# Altium PCB AphelionGroundStation.PcbDoc (part 1 of 3)
Units mm, origin at the board's own origin, x right, y up, seen from the top; angles counter-clockwise.
Board outline 70.66 x 90.48 mm, 2 copper layers (Top Layer, Bottom Layer); 32 components, 39 nets, 122 pads, 24 vias.
Unrouted connection lines stored in the file: 1.
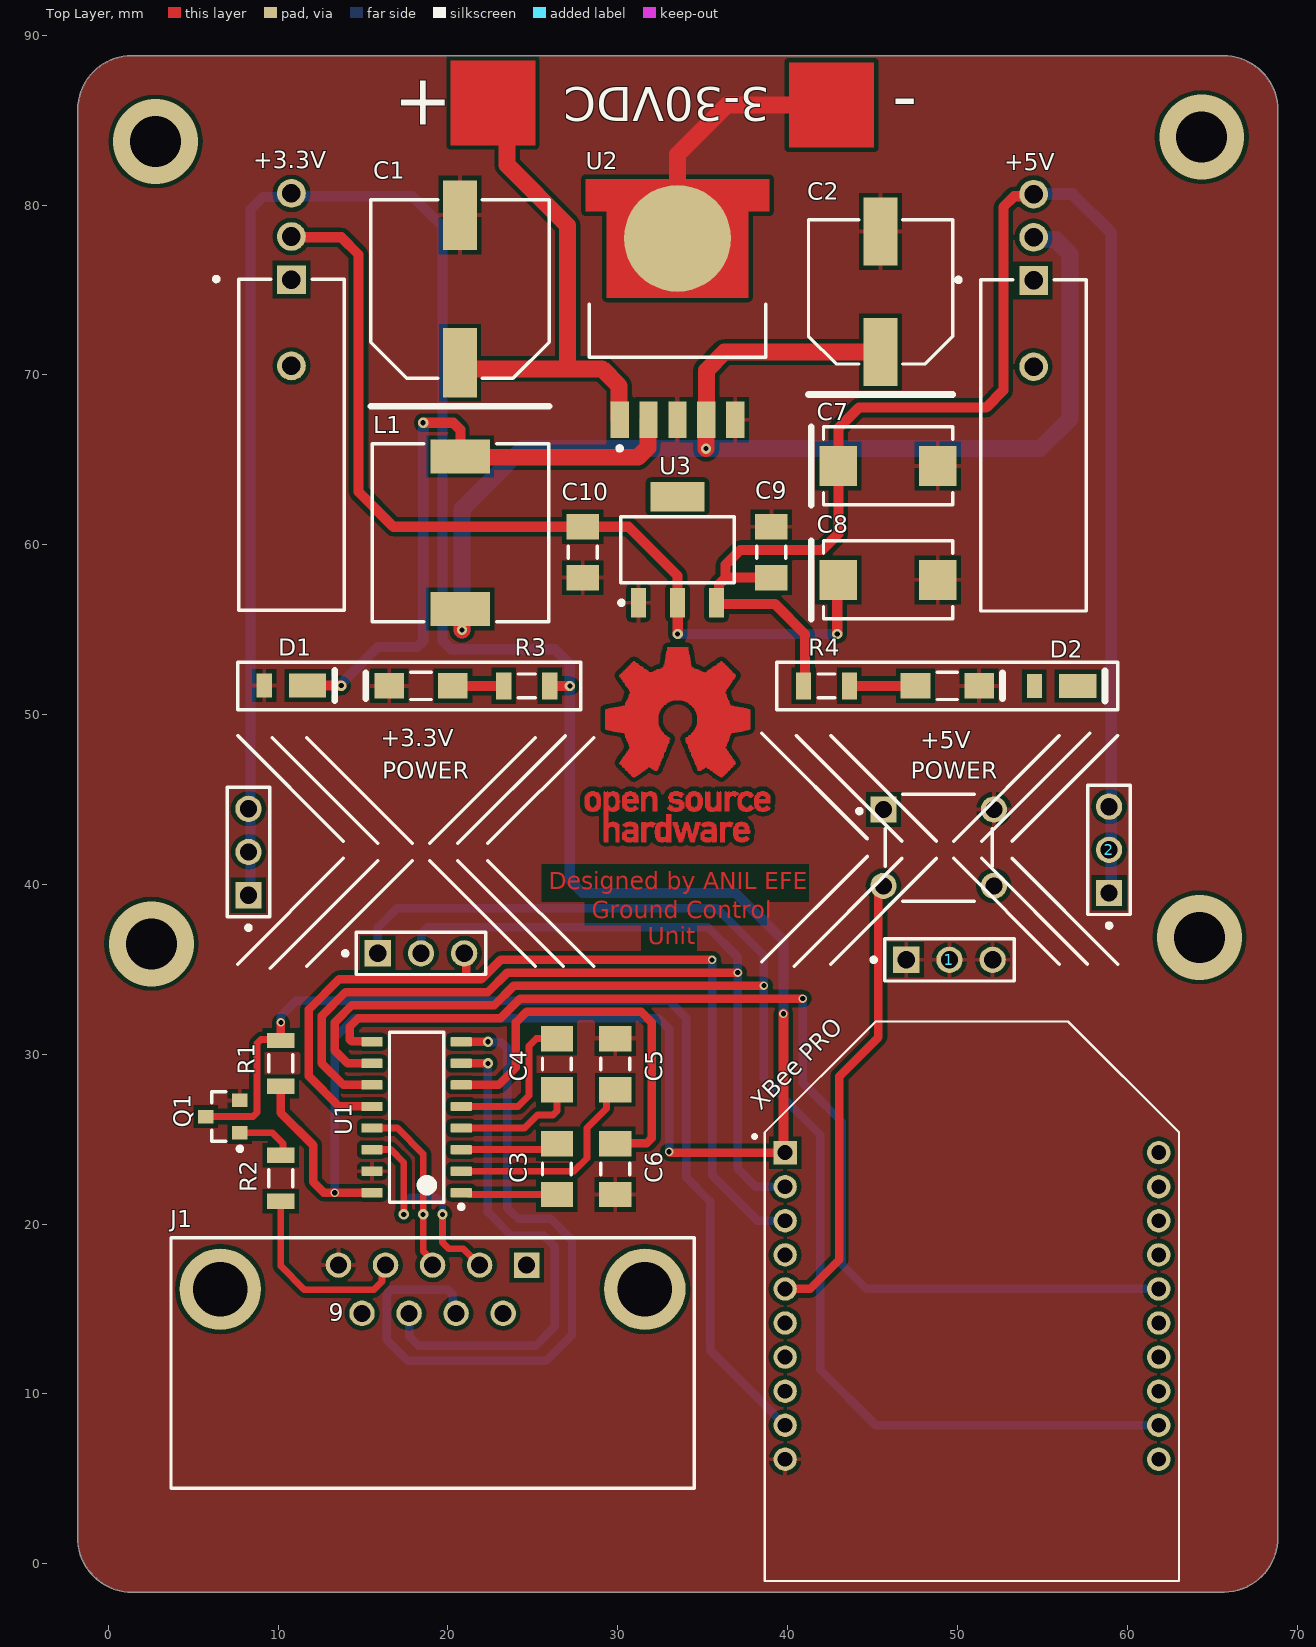
[diagram p0: Top Layer view]
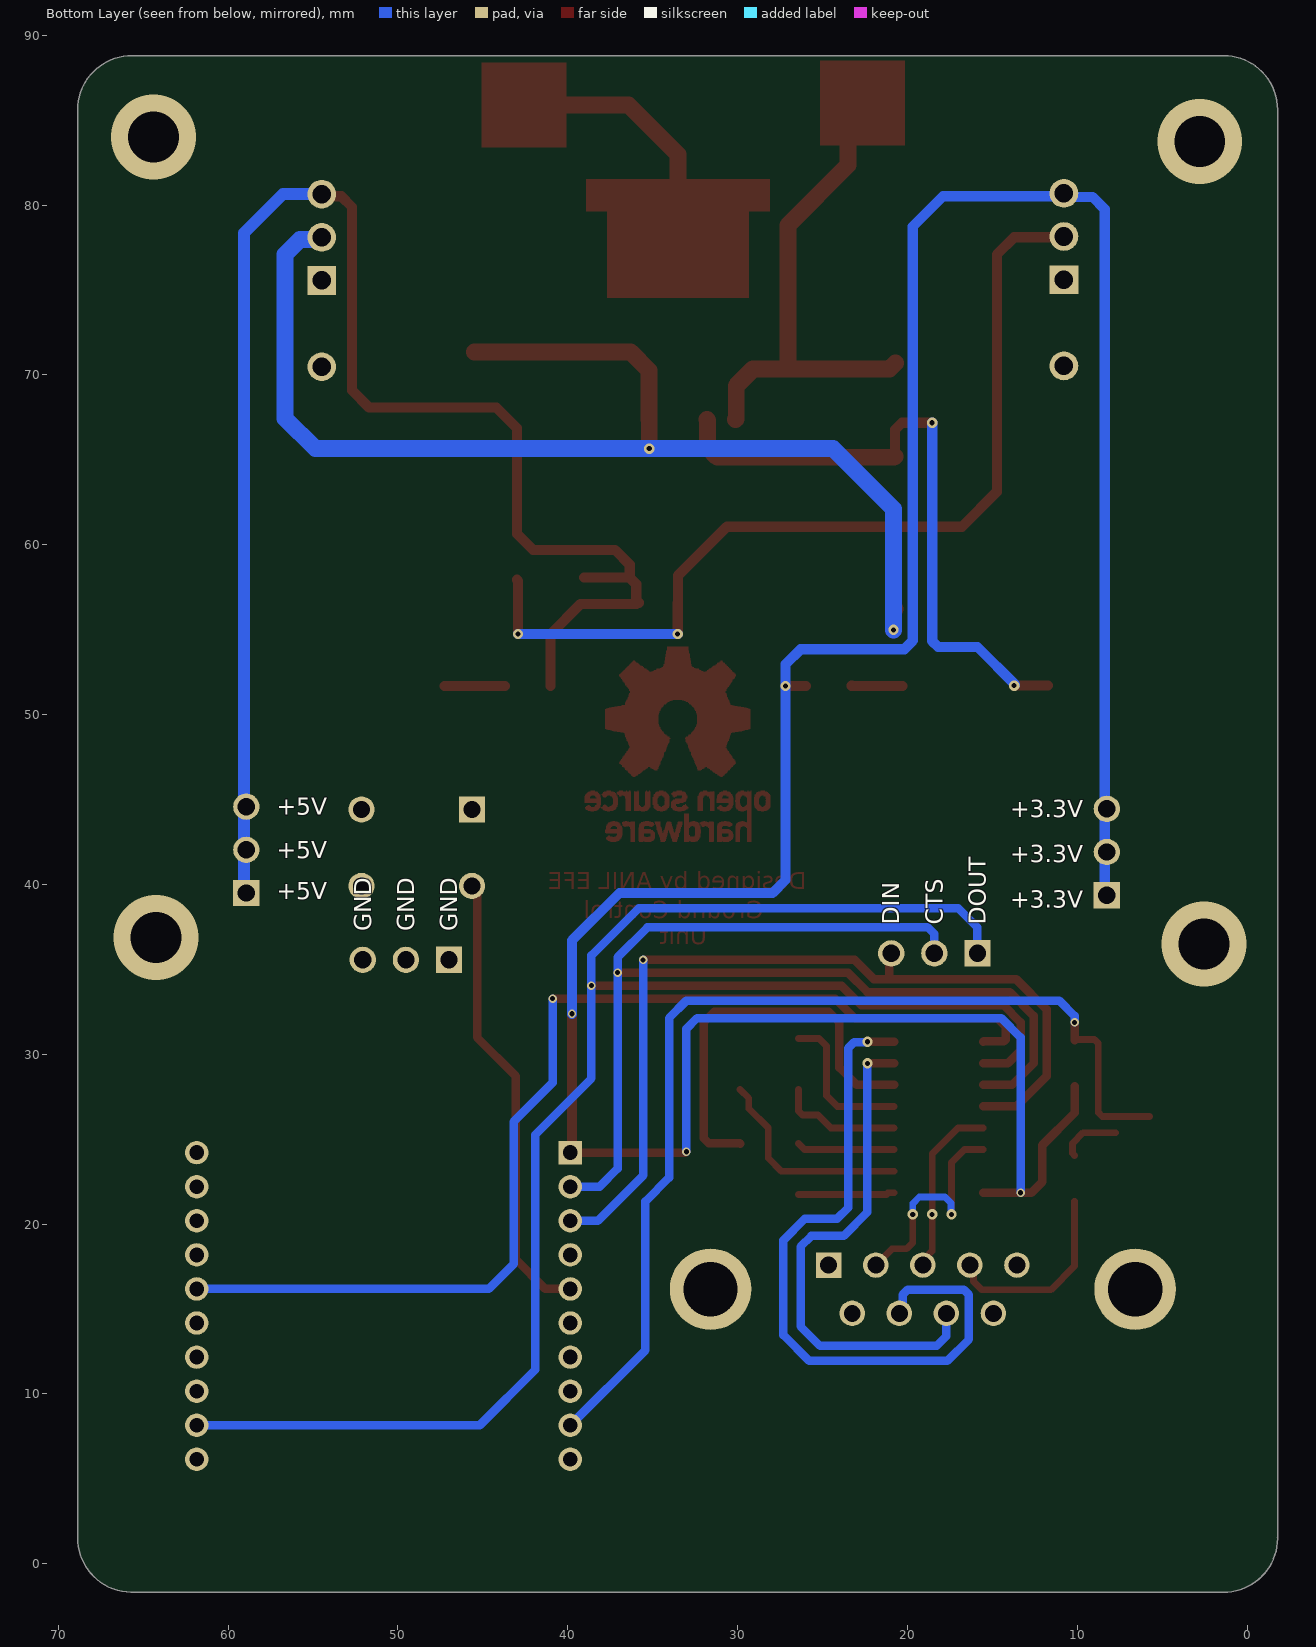
[diagram p1: Bottom Layer view, seen from below]
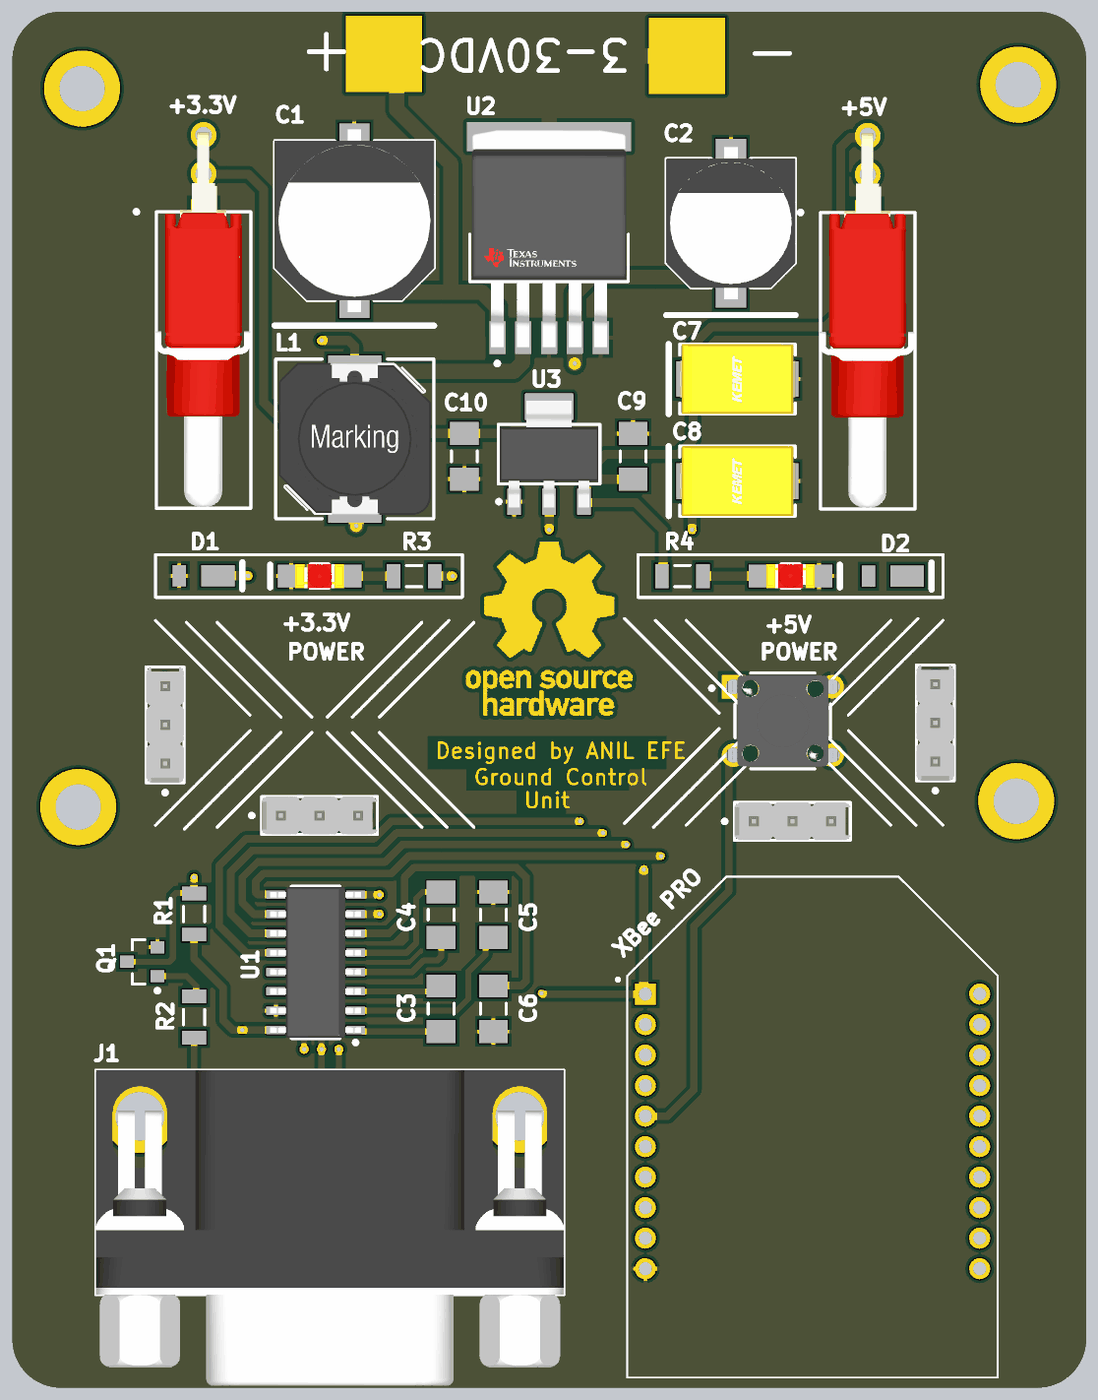
[diagram p4: 3D render of the assembled board from above, using the file's embedded part models]

## Layer stack, top to bottom
Top Solder: solder mask 0.0102, Solder Resist, Dk 3.5
Top Layer: signal copper 0.0356
Dielectric 1: dielectric 0.32, FR-4, Dk 4.8
Bottom Layer: signal copper 0.0356
Bottom Solder: solder mask 0.0102, Solder Resist, Dk 3.5

## Board outline
-1.792,1.489 cw(c-1.642,1.489) -1.789,1.519 cw(c-1.651,1.578) -1.801,1.578 -1.801,85.598 cw(c1.415,85.598) -0.859,87.872 cw(c1.371,85.642) 1.371,88.796 65.659,88.796 cw(c65.659,85.58) 67.933,87.854 cw(c65.703,85.624) 68.857,85.624 cw(c68.707,85.624) 68.857,85.621 68.857,1.524 cw(c65.641,1.524) 67.915,-0.75 cw(c65.685,1.48) 65.711,-1.674 cw(c65.659,-1.533) 65.659,-1.683 1.406,-1.683 cw(c1.406,1.533) -0.868,-0.741 cw(c1.362,1.489)

## Design rules (kind name [scope] priority, off if disabled: settings)
Clearance [All] p1: gap=0.254 ignorepadtopadclearanceinfootprint=FALSE except(0: Arc-Hole Track-Hole SMDPad-Hole THPad-Hole Via-Hole Fill-Hole Poly-Hole Region-Hole Text-Hole)
ComponentClearance [All] p1: gap=0 collisioncheckmode=3 verticalgap=0 showdistances=FALSE
Height [All] p1: minheight=0 maxheight=50 prefheight=12.7
PolygonConnect [All] p1: connectstyle=Relief reliefconductorwidth=0.254 reliefentries=4 polygonreliefangle="90 Angle" airgapwidth=0.254
RoutingVias [All] p1: holewidth=0.711 width=1.27 viastyle="Through Hole" minholewidth=0.711 minwidth=1.27 maxholewidth=0.711 maxwidth=1.27
SolderMaskExpansion [All] p1: expansion=0.102 istentingtop=FALSE
Width [All] p1: maxlimit=5 minlimit=0.254 preferedwidth=0.254 minimp=50.000000 maximp=50.000000 favimp=50.000000
28 further rules are at their usual default settings.

## Classes and differential pairs
component class AphelionGroundStation: +3.3V +5V C1 C2 C3 C4 C5 C6 C7 C8 C9 C10 D1 J1 Q1 R1 R2 R4 U1 U2 U3

## Components (designator, comment, footprint, x,y, rotation, side; value= is the part's Value field where it differs from the comment)
1 "Comment" MOLX-22-28-4033_V 49.53,35.56 r0 top
2 "Comment" MOLX-22-28-4033_V 58.928,42.037 r90 top
+3.3V "ET01MD1AVBE" FP-ET01MD1AVBE-MFG 10.785,65.894 r0 top (schematic designator SW2)
+3.3V "POWER LED 3.3V" KING-APTD3216CGCK_V 18.415,51.689 r180 top (schematic designator DS1)
+5V "ET01MD1AVBE" FP-ET01MD1AVBE-MFG 54.486,65.846 r0 top (schematic designator SW1)
+5V "POWER LED 3.3V" KING-APTD3216CGCK_V 49.403,51.689 r0 top (schematic designator DS2)
C1 "680uF" PNSC-FT-V-G_V 20.707,75.059 r90 top
C2 "220uF" PNSC-FP-V-F_V 45.478,74.894 r90 top
C3 "100N" KEMT-1206-2_M 26.416,23.241 r270 top
C4 "100N" KEMT-1206-2_M 26.416,29.419 r270 top
C5 "100N" KEMT-1206-2_M 29.851,29.419 r90 top
C6 "100N" KEMT-1206-2_M 29.851,23.241 r270 top
C7 "22uF" KEMT-T491-D_L 45.914,64.644 r0 top
C8 "22uF" KEMT-T491-D_L 45.914,57.933 r0 top
C9 "100N" KEMT-1206-2_M 39.044,59.563 r270 top
C10 "100N" KEMT-1206-2_M 27.94,59.563 r90 top
D1 "DFLS1200-7" DIOD-POWERDI123-2_A_V 10.785,51.708 r0 top
D2 "DFLS1200-7" DIOD-POWERDI123-2_A_V 56.134,51.689 r0 top (schematic designator D1)
J1 "DB9" 618009231321 19.094,11.805 r0 top
L1 "33uH" "WE-PD 1050" 20.732,60.706 r270 top
Q1 "BC846B" ONSC-SOT-23-3-318-08_V 6.747,26.33 r180 top
R1 "10K" RESC3216X60X45LL10T20 10.16,29.464 r270 top
R2 "1K" RESC3216X60X45LL10T20 10.16,22.694 r270 top
R3 "1K" RESC3216X60X45LL10T20 24.638,51.689 r180 top
R4 "1K" RESC3216X60X45LL10T20 42.291,51.689 r0 top
U1 "MAX232DR" D0016A_L 18.161,26.289 r180 top
U2 "LM2596SX-12/NOPB" FP-KTT0005B-MFG 33.515,75.494 r0 top
U3 "LM1117IMP-3.3" DCY0004A_N 33.515,59.708 r90 top
"XBee PRO" "XBP24CAUIT-001" MODULE_XBP24CAUIT-001 50.851,15.456 r0 top (schematic designator U)
? "Comment" FP-1825910-2-0 48.895,42.164 r0 top
? "Comment" MOLX-22-28-4033_V 8.255,41.91 r90 top
? "Comment" MOLX-22-28-4033_V 18.415,35.941 r0 top

## Footprints (in the part's own frame and the unit in brackets; to place one, negate y for a bottom-side part, rotate by r counter-clockwise, add the part's x,y. Pads: shape width x height; smd on the part's side, far side on the other; paste and mask are expansions set on the pad)
618009231321 [mm] "9 pins, right angled, 10.3mm, with hex screw"
  rect 1.5x1.5 hole 1: 1(5.54,5.78)
  round 1.5 hole 1: 2(2.77,5.78) 3(0,5.78) 4(-2.77,5.78) 5(-5.54,5.78) 6(4.155,2.94) 7(1.385,2.94) 8(-1.385,2.94) 9(-4.155,2.94)
  round 4.8 hole 3.2: M1(-12.5,4.36) M2(12.5,4.36)
  silkscreen extent -15.4,-7.36 15.4,7.39, body extent -15.4,-13.36 15.4,7.39, height 12.55
D0016A_L [mm] "SOIC, 16-Leads, Body 10x4mm, Pitch 1.27mm, IPC High Density"
  rrect18% 1.25x0.55 smd: 1(-2.625,4.445) 2(-2.625,3.175) 3(-2.625,1.905) 4(-2.625,0.635) 5(-2.625,-0.635) 6(-2.625,-1.905) 7(-2.625,-3.175) 8(-2.625,-4.445) 9(2.625,-4.445) 10(2.625,-3.175) 11(2.625,-1.905) 12(2.625,-0.635) 13(2.625,0.635) 14(2.625,1.905) 15(2.625,3.175) 16(2.625,4.445)
  silkscreen extent -2.75,-5 1.6,5.39, body extent -3,-4.95 3,4.95, height 1.59
DCY0004A_N [mm] "SOT223, 4-Leads, Body 6.7x3.7mm, Pitch 2.3mm, IPC Medium Density"
  rrect11% 1.75x0.9 smd: 1(-3.125,2.3) 2(-3.125,0) 3(-3.125,-2.3)
  rrect6% 1.75x3.2 smd: 4(3.125,0)
  silkscreen extent -3.25,-3.35 1.95,3.42, body extent -3.5,-3.25 3.5,3.25, height 1.62
DIOD-POWERDI123-2_A_V [mm] "SOD, 2-Leads, Body 2.8x1.78mm"
  rect 0.9x1.4 smd: 1(-1.6,0)
  rect 2.2x1.4 smd: 2(0.95,0)
  silkscreen extent 2.55,-0.89 2.55,0.89, body extent -1.4,-0.89 1.4,0.89, height 1.01
FP-1825910-2-0 [mm]
  rect 1.54x1.54 hole 0.99 paste-1000 mask+0: 1(-3.25,2.25)
  round 1.54 hole 0.99 paste-1000 mask+0: 2(3.25,2.25) 3(-3.25,-2.25) 4(3.25,-2.25)
  silkscreen extent -4.79,-3.15 3.15,3.15, body extent -4.12,-3.24 4.12,3.24, height 0.25
FP-ET01MD1AVBE-MFG [mm]
  rect 1.69x1.69 hole 1.09 paste-1000 mask+0: 1(0,9.715)
  round 1.69 hole 1.09 paste-1000 mask+0: 2(0,12.255) 3(0,14.795) 4(0,4.635)
  silkscreen extent -4.55,-9.74 3.11,9.87, body extent -3.21,-9.84 3.21,15.74, height 0.25
FP-KTT0005B-MFG [mm]
  rect 1.07x2.16 smd paste+0 mask+0: 1(-3.4,-8.13) 2(-1.7,-8.13) 3(0,-8.13) 4(1.7,-8.13) 5(3.4,-8.13)
  round 6.291 smd paste+0 mask+0: 6(0,2.545)
  Top Layer region: -5.4,6.04 5.4,6.04 5.4,4.13 4.165,4.13 4.165,-0.95 -4.165,-0.95 -4.165,4.13 -5.4,4.13 -5.4,6.04
  silkscreen extent -5.21,-9.95 5.21,-1.33, body extent -5.5,-9.31 5.5,6.14, height 0.25
KEMT-1206-2_M [mm] "SMD, 2-Leads, Body 3.4x1.8mm, IPC Low Density"
  rect 1.5x1.9 smd: 1(-1.5,0) 2(1.5,0)
  silkscreen extent -0.35,-0.85 0.35,0.85, body extent -1.7,-0.9 1.7,0.9, height 0.88
KEMT-T491-D_L [mm] "Molded Capacitor, 2-Leads, Body 7.60x4.60mm, IPC High Density"
  rect 2.2x2.35 smd: 1(-2.925,0) 2(2.925,0)
  silkscreen extent -4.52,-2.3 3.8,2.3, body extent -3.8,-2.3 3.8,2.3, height 3.1
KING-APTD3216CGCK_V [mm] "SMD, 2-Leads, Body 3.2x1.6mm"
  rect 1.75x1.5 smd: 1(-1.875,0) 2(1.875,0)
  silkscreen extent -0.6,-0.8 3.25,0.8, body extent -1.6,-0.8 1.6,0.8, height 1.8
MODULE_XBP24CAUIT-001 [mil]
  rect 54.25x54.25 hole 34.25: 1(-433,344.5)
  round 54.25 hole 34.25: 2(-433,265.5) 3(-433,186.5) 4(-433,107.5) 5(-433,28.5) 6(-433,-50.5) 7(-433,-129.5) 8(-433,-208.5) 9(-433,-287.5) 10(-433,-366.5) 11(433,-366.5) 12(433,-287.5) 13(433,-208.5) 14(433,-129.5) 15(433,-50.5) 16(433,28.5) 17(433,107.5) 18(433,186.5) 19(433,265.5) 20(433,344.5)
  silkscreen extent -508,-648 480,648
MOLX-22-28-4033_V [mm] "THD, 3-Leads, Body 7.62x2.49mm, Pitch 2.54mm"
  rect 1.55x1.55 hole 1.02: 1(-2.54,0)
  round 1.55 hole 1.02: 2(0,0) 3(2.54,0)
  silkscreen extent -4.58,-1.24 3.81,1.24, body extent -3.81,-1.24 3.81,1.24, height 8.38
ONSC-SOT-23-3-318-08_V [mm] "SOT23, 3-Leads, Body 2.92x1.3mm, Pitch 0.95mm"
  rect 0.9x0.8 smd: 1(-1,0.95) 2(-1,-0.95) 3(1,0)
  silkscreen extent -1.13,-1.46 0.65,2.02, body extent -0.65,-1.46 0.65,1.46, height 1.11
PNSC-FP-V-F_V [mm] "CAPAE, 2-Leads, Body 8.50x8.50mm"
  rect 4x2 smd: 1(-3.55,0) 2(3.55,0)
  silkscreen extent -6.05,-4.25 4.25,4.25, body extent -5,-4.25 5,4.25, height 10.5
PNSC-FT-V-G_V [mm] "CAPAE, 2-Leads, Body 10.50x10.50mm"
  rect 4.1x2 smd: 1(-4.35,0) 2(4.35,0)
  silkscreen extent -6.9,-5.25 5.25,5.25, body extent -6,-5.25 6,5.25, height 10.5
RESC3216X60X45LL10T20 [mm] "Chip Resistor, 2-Leads, Body 3.20x1.60mm, IPC High Density"
  rect 0.9x1.6 smd: 1(-1.35,0) 2(1.35,0)
  silkscreen extent -0.5,-0.7 0.5,0.7, body extent -1.65,-0.85 1.65,0.85, height 0.6
"WE-PD 1050" [mm] "SMD Inductor, 2-Leads, Body 10,0x10,0mm"
  rect 2x3.5 smd: 1(-4.5,0) 2(4.5,0)
  silkscreen extent -5.25,-5.2 5.25,5.2, body extent -5,-5 5,5, height 4.75

## Part data
+3.3V +5V: library part CMP-10041-000001-1, "SWITCH TOGGLE SPDT 0.4VA 20V", Contact Resistance=20mΩ, Manufacturer="C&K Components", Temperature="-30°C to +85°C", Temperature Range High=+85°C, Temperature Range Low=-30°C, Voltage Rating Ac=20V, Automotive=No, Category=Switch, ComponentLink2Description=Datasheet, ComponentLink2URL=https://www.ckswitches.com/media/1387/ettoggle.pdf, Device Class L1=Electromechanical, Device Class L2=Switches, Device Class L3="Toggle Switches", Digikey Description="SWITCH TOGGLE SPDT 0.4VA 20V", Electromechanical Life=60000Cycles, Height=8.77mm, Lead Free=Yes, Manufacturer Part Number=ET01MD1AVBE, Mount="Through Hole", Mouser Description="Toggle Switches ON-ON SPDT R/A PCB", Octopart=https://octopart.com/et01md1avbe-c%26k+components-2490750, Package=ET01MD1AVBE, RoHS=TRUE, Standoff Height=0.64mm, Throw Configuration=SPDT, Voltage Rating Dc=20V
+3.3V +5V: library part CMP-2000-05792-1, "Chip LED Lamp, Green, 5 V, 30 mA, -40 to 85 degC, 2-Pin SMD, RoHS, Tape and Reel", Color=Green, Current - Test=20mA, Manufacturer=Kingbright, Millicandela Rating=300mcd, Package / Case=1206(3216Metric), Package Description="2-Pin Surface Mount Device, Body 3.2 x 1.6 mm", Package Reference=APTD3216CGCK, Standard Package=2,000, Voltage - Forward (Vf) (Typ)=2.1V, 3D Model="APTD3216x.sldprt /  / APTD3216x.pro /  / APTD3216x.igs /  / APTD3216x.stp", Catalog Drawings="APTD3216SeriesTop /  / APTD3216SeriesSide", Category=Optoelectronics, Datasheet URL=https://www.kingbrightusa.com/images/catalog/spec/APTD3216CGCK.pdf, Datasheet Version="Rev. V.17B, 04/2015", Family=LEDIndication-Discrete, Height=1.80mm, Lens Style/Size=RoundwithDomedTop,1.6mm, Lens Type=Clear, Manufacturer URL=http://www.kingbright.com/, Mounting Technology=SurfaceMount, Mounting Type=SurfaceMount, Online Catalog=3.2mmx1.6mmRoundwithDomedTop1206PackageLEDs, Other Names=754-1152-2, Packaging=Tape&Reel(TR), Size / Dimension=3.20mmLx1.60mmW, Viewing Angle=50°, Wavelength - Dominant=570nm, Wavelength - Peak=574nm
C1: library part CMP-2000-06218-1, "Aluminum Electrolytic Capacitor, 560 uF, +/- 20%, 35 V, 2-Pin SMD (Size Code G), -55 to 105 degC, RoHS, Tape and Reel", Capacitance=560µF, Case Size/Dimension=Ø10x10.2mm, ESR (Equivalent Series Resistance)=0.06O, Lifetime@Temperature=2000Hrs@105°C, Manufacturer=Panasonic, Operating Temp Range=-55to+105°C, Operating Temp-Max=105°C, Package Description="2-Pin Electrolytic Aluminum Capacitor, Body 10.3 x 10.3 mm", Package Reference=FT-V-G, Rated Voltage=35V, Ripple Current=1190mA, Datasheet URL=http://industrial.panasonic.com/cdbs/www-data/pdf/RDE0000/ABA0000C35.pdf, Datasheet Version=03/2014, Manufacturer URL=http://www.panasonic.com/, Mounting Technology=SurfaceMount, Package URL=http://industrial.panasonic.com/cdbs/www-data/pdf/RDE0000/DME0000COL48.pdf, Series=FT, Type=Can
C2: library part CMP-2000-06215-1, "Aluminum Electrolytic Capacitor, 220 uF, +/- 20%, 35 V, 2-Pin SMD (Size Code F), -55 to 105 degC, RoHS, Tape and Reel", AE Capacitor Case=RadialCan-SMD, Capacitance=220µF, Capacitance Tolerance=±20%, Leakage Current=7.7µA, Life Time @ Temperature=2000hours@105°C, Manufacturer=Panasonic, Operating Temperature Max=105°C, Operating Temperature Min=-55°C, Operating Temperature Range=-55°Cto+105°C, Package Description="2-Pin Electrolytic Aluminum Capacitor, Body 8.3 x 8.3 mm", Package Reference=FP-V-F, Ripple Current AC=850mA, Voltage Rating=35V, Capacitance Tolerance ±=±20%, Capacitor Case Style=RadialCan-SMD, Datasheet URL=http://industrial.panasonic.com/cdbs/www-data/pdf/RDE0000/ABA0000C1184.pdf, Datasheet Version=03/2016, Diameter=8mm, ESR=0.08ohm, External Length / Height=10.2mm, Height=10.2mm, Lifetime @ Temperature=2000hours@105°C, Manufacturer URL=http://www.panasonic.com/, Mounting Technology=SurfaceMount, Package URL=http://industrial.panasonic.com/cdbs/www-data/pdf/RDE0000/DME0000COL48.pdf, Packaging=CutTape, Product Range=PANASONIC-FPSeries, Series=FP, SVHC=ToBeAdvised
C3 C4 C5 C6 C9 C10: library part CMP-2000-05169-1, "CAP, Ceramic, 0.1 uF, +/- 10%, 50 V, -55 to 125 degC, 1206 (3216 Metric), RoHS, Tape and Reel", Capacitance=0.1µF, Capacitance Tolerance=±10%, Capacitor Case Style=1206[3216Metric], Dielectric Characteristic=X7R, Manufacturer=Kemet, Operating Temperature Max=125degC, Operating Temperature Min=-55degC, Package Description="2-Leads SMD, Body 3.2 x 1.6 mm", Package Reference=1206-2, Voltage Rating=50V, Datasheet URL=https://datasheet.ciiva.com/6125/1725438-6125494.pdf, Datasheet Version=Jul-13, Manufacturer URL=http://www.kemet.com/, Packaging=Tape&Reel, Product Range=KEMET-CSeries, SVHC=ToBeAdvised
C7 C8: library part CMP-2000-07201-1, "Tantalum Surface Mount Capacitor, 22 uF, +/- 10%, 16 V, -55 to 125 degC, 2-Pin SMD, RoHS, Tape and Reel", Capacitance=22µF, Capacitance Tolerance=±10%, Capacitor Case Style=2917, Capacitor Terminals=SMD, Manufacturer=Kemet, Operating Temperature Range=-55°Cto+125°C, Package Description="2-Pin Surface Mount Device, Body 7.3 x 4.3 mm", Package Reference=T491-D, Voltage Rating=16V, Datasheet URL=http://www.kemet.com/Lists/ProductCatalog/Attachments/254/KEM_T2005_T491.pdf, Datasheet Version=06/2016, ESR=0.8ohm, Lead Spacing=–, Manufacturer URL=http://www.kemet.com/, Mounting Technology=SurfaceMount, MSL=MSL1-Unlimited, SVHC=–
D1 D2: library part CMP-2000-07540-1, "High Voltage Schottky Barrier Rectifier, 200 V, 1 A, -65 to 175 degC, 2-Pin SMD, RoHS, Tape and Reel", Average Rectified Current=1A, Capacitance=23pF, Forward Voltage=850mV, Manufacturer="Diodes Inc", Max Forward Surge Current (Ifsm)=40A, Max Operating Temperature=150degC, Max Repetitive Reverse Voltage (Vrrm)=200V, Min Operating Temperature=-65degC, Package Description="2-Pin Small Outline Diode, Body 2.8 x 1.78 mm", Package Quantity=3000, Package Reference=POWERDI123-2_A, Peak Reverse Current=2uA, Contact Plating=Matte, Current Rating=1A, Datasheet URL=https://www.diodes.com/assets/Datasheets/ds30628.pdf, Datasheet Version="Rev. 6-2, 10/2008", Element Configuration=Single, Forward Current=1A, Height=0.98mm, Lead Free=LeadFree, Length=2.8mm, Manufacturer URL=http://www.diodes.com/, Mount=SurfaceMount, Mounting Technology=SurfaceMount, Number of Pins=2, Output Current=1A, Packaging=TapeandReel, Peak Non-Repetitive Surge Current=40A, Polarity=Standard, Radiation Hardening=No, REACH SVHC=NoSVHC, Reverse Voltage (DC)=200V, RoHSCompliant=true, Termination=SMD/SMT, Voltage Rating (DC)=200V, Width=1.78mm
J1: library part CMP-1502-00204-1, "Female PCB Connector with Hex Screw WR-DSUB, 10.30 mm, Angled, 9 pins", Contact Resistance=30mOhm, Manufacturer="Wurth Elektronik", Operating Temperature=-40to85degC, Package Reference=618009231321, Rated Current=3A, Working Voltage=125VAC, Datasheet URL=https://katalog.we-online.de/em/datasheet/6180xx231321.pdf, Gender=Female, Manufacturer URL=http://www.we-online.de, Mounting Technology=THT, Orientation=Angled, Packaging=Tray, Part Number=618009231321, Pin Number=9, Publisher=WurthElektronik
L1: library part CMP-1396-00022-1, "SMD-Shielded Power Inductor WE-PD, L=33.0 µH", Manufacturer="Wuerth Elektronik", PartNumber=7447714330, Inductance="33.0 ÂµH", ComponentLink1Description="Manufacturer URL", ComponentLink1URL=http://www.we-online.com, ComponentLink2Description=Datasheet, ComponentLink2URL=http://www.we-online.de/katalog/media/pdf/7447714330.pdf, PackageReference="WE-PD 1050"
Q1: library part CMP-1048-00779-1, "General Purpose Transistor, NPN Silicon, 3-Pin SOT-23, Pb-Free, Tape and Reel", Manufacturer="On Semiconductor", PartNumber=BC846BLT1G, ComponentLink1Description="Manufacturer URL", ComponentLink1URL=http://www.onsemi.com/, ComponentLink2Description=Datasheet, ComponentLink2URL=http://www.onsemi.cn/pub_link/Collateral/BC846ALT1-D.PDF, ComponentLink3Description="Package Specification", ComponentLink3URL=http://www.onsemi.cn/pub_link/Collateral/318-08.PDF, DatasheetVersion="Rev. 11", fT Min (MHz)=100, Mounting Technology="Surface Mount", PackageDescription="3-Pin Small Outline Transistor, Body 2.92 x 1.3 mm, Pitch 0.95 mm", PackageReference=SOT-23-3-318-08, PackageVersion="Rev. AP, 11/2009", Packing="Tape and Reel", Polarity=NPN, RoHS=TRUE, IC Continuous (A)=0.1
R1 R2 R3 R4: library part CMP-2003-02243-1, Manufacturer="Vishay Dale", Part Number=CRCW12064M70FKEA
U1: library part CMP-0299-00150-2, "Dual EIA-232 Driver / Receiver, 0 to 70 degC, 16-Pin SOIC (D), Green (RoHS & no Sb/Br)", Drivers Per Package=2, Supply Voltage(s)(V)=5, ComponentLink1Description="Manufacturer URL", ComponentLink1URL=www.ti.com, ComponentLink2Description=Datasheet, ComponentLink2URL=http://www.ti.com/general/docs/lit/getliterature.tsp?genericPartNumber=MAX232&fileType=pdf, ComponentLink3Description="Package Specification", ComponentLink3URL=http://www.ti.com/litv/pdf/mpds178g, DatasheetVersion=SLLS047L, ESD HBM(kV)=+/-2, PackageDescription="16-Pin Plastic Small Outline Integrated Circuit, 9.9 x 3.9 mm, Pitch 1.27 mm Pitch", PackageReference=D0016A, PackageVersion="revM, Jun-2011", Receivers Per Package=2, RS-232=TRUE, Single Supply=TRUE, SubFamily=RS-232, ICC(Max)(mA)=10
U2: library part CMP-04918-000013-1, "IC REG BUCK 12V 3A TO263-5", Manufacturer="Texas Instruments", Max Junction Temp=+150°C, Max Supply Voltage=40V, Min Supply Voltage=4.5V, Nominal Supply Current=5mA, Output Current=3A, Output Voltage=12V, Package=KTT0005B, Switching Frequency=150kHz, Temperature="-40°C to +125°C", Temperature Range High=+125°C, Temperature Range Low=-40°C, Automotive=No, Category=IC, ComponentLink2Description=Datasheet, ComponentLink2URL=http://www.ti.com/lit/ds/symlink/lm2596.pdf, Device Class L1="Integrated Circuits (ICs)", Device Class L2="Power Management ICs", Device Class L3="Voltage Regulators - Switching", Digikey Description="IC REG BUCK 12V 3A TO263-5", Height=4.8mm, Lead Free=Yes, Manufacturer Part Number=LM2596SX-12/NOPB, Max Duty Cycle=100%, Mouser Description="SIMPLE SWITCHER® 4.5V to 40V, 3A Low Component Count Step-Down Regulator 5-DDPAK/TO-263", Number Of Outputs=1, Octopart=https://octopart.com/lm2596sx-12%2Fnopb-texas+instruments-24812942, Output Type=Fixed, RoHS=TRUE, Standoff Height=0mm, Switching Topology=Buck
U3: library part CMP-0062-01631-4, "800mA Low-Dropout Linear Regulator, 4-pin SOT-223, Pb-Free", Manufacturer="Texas Instruments", PackageTopMarking=XYTT*N05B, PartNumber=LM1117IMP-3.3/NOPB, PowerWise=N, Code_JEDEC=TO-261-AA, Code_IPC=SOT223-4, ComponentLink1Description="Datasheet URL", ComponentLink1URL=http://www.ti.com/general/docs/lit/getliterature.tsp?genericPartNumber=LM1117-N&fileType=pdf, CompType="LDO IC", High-Reliability=Y, PackageDescription="Molded SOT-223, 6.50 x 3.56 x 1.6mm Body, 4 Lead, 2.3mm Pitch", PackageReference=DCY0004A, PinCount=4, RoHS=Y
"XBee PRO": "802.15.4 Transceiver Module 2.4GHz Antenna Not Included, U.FL Through Hole", Package="Module Digi International", Availability=Unavailable, MF="Digi International", MP=XBP24CAUIT-001, Price=None, SnapEDA_Link=https://www.snapeda.com/parts/XBP24CAUIT-001/Digi%20International/view-part/1219456/?ref=snap

## Via types
v1: diameter 0.6, hole 0.3, Top Layer to Bottom Layer, 12 vias
v2: diameter 0.5, hole 0.3, Top Layer to Bottom Layer, 8 vias
v3: diameter 5, hole 3, Top Layer to Bottom Layer, 4 vias

## Nets (pads, with @x,y where several pads share a name; then routed paths per layer and width w, separated by ;. In a path a pad name is that pad's centre, name@x,y a point inside that pad or via, vN(x,y) a via of type N, cw(c..) or ccw(c..) an arc to the next point about the centre after c; other vN are vias at no path point)
+3.3V: "XBee PRO.1" +3.3V.3 ?.1@8.255,39.37 ?.2@8.255,41.91 ?.3@8.255,44.45 R1.2 R3.1 U1.16 | length 179.7
  Top Layer w0.5: R1.2@10.16,28.114 10.16,26.543 12.065,24.638 12.065,22.479 12.7,21.844 v2(13.335,21.844) U1.16@15.536,21.844 ; v2(33.02,24.257) 33.071,24.206 39.853,24.206
  Top Layer w0.6: +3.3V.3@10.74,80.645 +3.3V.3@10.785,80.689 ; R3.1@25.988,51.689 v1(27.178,51.689) ; v2(39.751,32.385) 39.751,24.308 39.853,24.206
  Bottom Layer w0.5: v2(13.335,21.844) 13.335,30.988 14.478,32.131 32.385,32.131 33.02,31.496 v2(33.02,24.257)
  Bottom Layer w0.6: ?.1@8.382,39.37 8.382,44.45 8.382,79.756 9.107,80.481 10.576,80.481 +3.3V.3@10.785,80.689 10.956,80.518 17.907,80.518 19.685,78.74 19.685,54.356 20.193,53.848 26.289,53.848 27.178,52.959 v1(27.178,51.689) 27.178,40.259 27.94,39.497 36.957,39.497 39.751,36.703 v2(39.751,32.385)
+3.3V_USB: 
+5V: 2.1 2.2 2.3 +5V.3 C7.1 C9.2 R4.1 U3.3 | length 96
  Top Layer w0.6: C9.2@39.044,58.063 36.346,58.063 ; R4.1@41.021,51.69 41.021,54.737 39.243,56.515 35.965,56.515 35.897,56.583 U3.3@35.815,56.583 35.965,56.733 35.965,57.682 36.346,58.063 ; +5V.3@54.486,80.641 54.362,80.518 53.34,80.518 52.705,79.883 52.705,69.088 51.689,68.072 44.196,68.072 42.989,66.865 C7.1@42.989,64.644 42.989,60.642 42.037,59.69 37.211,59.69 36.346,58.825 36.346,58.063
  Bottom Layer w0.7: +5V.3@54.486,80.641 56.773,80.641 59.055,78.359 59.055,44.577 2.1@59.055,39.243
+12V: C1.1 U2.1 | length 29.1
  Top Layer w1: C1.1@20.707,70.709 21.058,70.358 27.046,70.358 ; 23.109,85.906 23.49,85.525 23.49,82.35 27.046,78.794 27.046,70.358 ; U2.1@30.115,67.364 30.08,67.399 30.08,69.361 29.083,70.358 27.046,70.358
CBUS0: 
CBUS1: 
CTS: "XBee PRO.12" ?.1@15.875,35.941 U1.10 | length 103.3
  Top Layer w0.5: U1.10@15.536,29.464 14.097,29.464 13.335,30.226 13.335,31.877 14.351,32.893 22.733,32.893 23.876,34.036 v2(38.608,34.036)
  Bottom Layer w0.5: ?.1@15.875,35.941 15.875,37.465 17.018,38.608 35.814,38.608 38.608,35.814 v2(38.608,34.036) 38.608,28.575 41.91,25.273 41.91,11.43 45.187,8.153 61.849,8.153
DIN: "XBee PRO.3" ?.3@20.955,35.941 U1.12 | length 52.9
  Top Layer w0.5: U1.12@15.536,26.924 13.589,26.924 11.811,28.702 11.811,32.639 13.589,34.417 21.082,34.417 ; ?.3@20.955,35.941 21.082,35.814 21.082,34.417 ; v2@35.433,35.56 23.114,35.56 21.971,34.417 21.082,34.417
  Bottom Layer w0.5: v2(35.56,35.56) 35.56,22.86 38.227,20.193 39.853,20.193
DOUT: "XBee PRO.2" ?.2@18.415,35.941 U1.11 | length 68.2
  Top Layer w0.5: U1.11@15.536,28.194 13.843,28.194 12.573,29.464 12.573,32.258 13.97,33.655 22.352,33.655 23.495,34.798 v2@37.084,34.798
  Bottom Layer w0.5: ?.2@18.415,35.941 18.415,36.225 18.415,37.084 18.796,37.465 35.306,37.465 37.063,35.708 v2(37.063,34.805) 37.063,23.262 38.125,22.2 39.853,22.2
DTR: "XBee PRO.9" Q1.3 R1.1 | length 61.2
  Top Layer w0.4: Q1.3@5.747,26.33 8.529,26.33 8.763,26.564 8.763,30.627 8.997,30.861 R1.1@10.16,30.861
  Top Layer w0.5: R1.1@10.16,30.814 10.16,30.861 v2(10.16,31.877)
  Bottom Layer w0.5: v2(10.16,31.877) 10.16,32.258 11.049,33.147 33.02,33.147 34.036,32.131 34.036,22.733 35.433,21.336 35.433,12.573 39.853,8.153
FT_VCC: 
GND: 1.1 1.2 1.3 "XBee PRO.10" +3.3V.2@16.54,51.689 +5V.2@51.278,51.689 ?.2@52.145,44.414 C1.2 C2.2 C5.2 C6.2 C7.2 C8.2 C9.1 C10.1 D1.1 J1.5 Q1.2 U1.15 U2.3 U2.5 U2.6 U3.1 | length 13.9
  Top Layer w1: U2.6@33.515,78.039 33.515,82.977 36.423,85.885 41.27,85.885
NetC2_1: +5V.2@54.486,78.101 C2.1 L1.2 U2.4 | length 73.9
  Top Layer w1: L1.2@20.732,56.206 20.828,56.11 v1(20.828,54.991) ; v1(35.203,65.656) 35.203,67.352 U2.4@35.215,67.364 35.215,70.267 36.292,71.344 C2.1@45.478,71.344
  Bottom Layer w1: v1(20.828,54.991) 20.828,62.103 24.381,65.656 v1(35.203,65.656) 54.861,65.656 56.642,67.437 56.642,77.089 55.762,77.969 54.618,77.969 +5V.2@54.486,78.101
NetC3_1: C3.1 U1.3 | length 5.8
  Top Layer w0.4: U1.3@20.786,24.384 26.059,24.384 C3.1@26.416,24.741
NetC3_2: C3.2 U1.1 | length 5.7
  Top Layer w0.4: U1.1@20.786,21.844 21.136,21.844 21.239,21.741 C3.2@26.416,21.741
NetC4_1: C4.1 U1.5 | length 9
  Top Layer w0.4: U1.5@20.786,26.924 24.13,26.924 24.765,27.559 24.765,30.48 25.204,30.919 C4.1@26.416,30.919
NetC4_2: C4.2 U1.4 | length 7.3
  Top Layer w0.4: U1.4@20.786,25.654 24.511,25.654 25.273,26.416 26.182,26.416 26.416,26.65 C4.2@26.416,27.919
NetC5_1: C5.1 U1.2 | length 12.5
  Top Layer w0.4: U1.2@20.786,23.114 27.432,23.114 28.194,23.876 28.194,25.654 29.343,26.803 29.343,27.41 C5.1@29.851,27.919
NetC6_1: C6.1 U1.6 | length 23.9
  Top Layer w0.5: U1.6@20.786,28.194 22.987,28.194 24.003,29.21 24.003,31.877 24.638,32.512 31.369,32.512 32.004,31.877 32.004,25.058 31.711,24.765 29.875,24.765 C6.1@29.851,24.741
NetC8_1: +3.3V.2@10.785,78.149 C8.1 C10.2 U3.2 | length 55.3
  Top Layer w0.6: +3.3V.2@10.785,78.149 10.829,78.105 13.716,78.105 14.732,77.089 14.732,63.119 16.788,61.063 C10.2@27.94,61.063 30.631,61.063 33.515,58.179 U3.2@33.515,56.583 33.528,56.57 v1(33.528,54.737) ; v1(42.926,54.737) 42.926,57.87 C8.1@42.989,57.933
  Bottom Layer w0.6: v1(33.528,54.737) v1(42.926,54.737)
NetD1_2: D1.2 L1.1 U2.2 | length 37.7
  Top Layer w0.6: D1.2@11.735,51.708 13.709,51.708 v1(13.716,51.701) ; v1(18.542,67.183) 20.32,67.183 20.732,66.771 L1.1@20.732,65.206
  Top Layer w1: L1.1@20.732,65.206 20.787,65.151 31.194,65.151 31.78,65.737 31.78,67.329 U2.2@31.815,67.364
  Bottom Layer w0.6: v1@13.658,51.758 15.875,53.975 18.191,53.975 18.542,54.326 v1(18.542,67.183)
NetDS1_1: +3.3V.1@20.29,51.689 R3.2 | length 3
  Top Layer w0.6: +3.3V.1@20.302,51.677 +3.3V.1@20.29,51.689 23.263,51.689 23.276,51.701 R3.2@23.288,51.689
NetDS2_1: +5V.1@47.528,51.689 R4.2 | length 3.6
  Top Layer w0.6: R4.2@43.688,51.689 +5V.1@47.244,51.689
NetDS3_2: 
NetDS4_2: 
NetJ3_1: 
NetJ3_2: 
NetJ3_3: 
NetJ3_5: 
NetQ1_1: Q1.1 R2.1 | length 3.6
  Top Layer w0.4: Q1.1@7.747,25.38 9.652,25.38 10.287,24.745 10.287,24.171 R2.1@10.16,24.044
RESET: "XBee PRO.5" ?.3@45.645,39.914 | length 27
  Top Layer w0.5: 39.853,16.18 41.326,16.18 43.053,17.907 43.053,28.702 45.339,30.988 45.339,39.608 45.446,39.715 ?.3@45.645,39.914
RS232-CTS: J1.8 U1.7 | length 30.4
  Top Layer w0.5: U1.7@20.786,29.464 v1(22.352,29.464)
  Bottom Layer w0.5: J1.8@17.709,14.745 17.709,13.406 18.288,12.827 25.146,12.827 26.289,13.97 26.289,18.669 25.654,19.304 23.749,19.304 22.352,20.701 v1(22.352,29.464)
RS232-DTR: J1.4 R2.2 | length 11.6
  Top Layer w0.4: R2.2@10.16,21.344 10.16,17.526 11.557,16.129 15.621,16.129 16.114,16.622 16.114,17.374 J1.4@16.324,17.585
RS232-RTS: J1.7 U1.8 | length 42.5
  Top Layer w0.5: U1.8@20.786,30.734 v1(22.352,30.734)
  Bottom Layer w0.5: J1.7@20.479,14.745 20.288,14.936 20.288,15.836 19.995,16.129 16.676,16.129 16.383,15.836 16.383,13.208 17.653,11.938 25.781,11.938 27.305,13.462 27.305,19.05 26.035,20.32 24.13,20.32 23.495,20.955 23.495,30.353 23.133,30.715 22.371,30.715 v1(22.352,30.734)
RS232-RX: J1.3 U1.13 | length 10.4
  Top Layer w0.4: U1.13@15.536,25.654 17.018,25.654 18.542,24.13 v1(18.542,20.574) 18.542,18.415 19.094,17.863 J1.3@19.094,17.585
RS232-TX: J1.2 U1.14 | length 13.5
  Top Layer w0.4: U1.14@15.536,24.384 16.637,24.384 17.399,23.622 v1(17.399,20.574) ; v1(19.685,20.574) 19.685,18.923 20.066,18.542 20.907,18.542 J1.2@21.864,17.585
  Bottom Layer w0.4: v1@17.41,20.563 v1(17.399,20.574) 17.437,20.612 17.437,21.247 17.78,21.59 19.304,21.59 19.685,21.209 v1(19.685,20.574) ; J1.2@21.864,17.585 J1.2@21.864,17.633
RTS: "XBee PRO.16" U1.9 | length 65.3
  Top Layer w0.5: U1.9@15.536,30.734 15.511,30.759 14.326,30.759 14.224,30.861 14.224,31.623 14.732,32.131 23.114,32.131 24.257,33.274 v2(40.894,33.274)
  Bottom Layer w0.5: v2(40.894,33.274) 40.894,28.321 43.18,26.035 43.18,17.653 44.653,16.18 61.849,16.18
USB_D+: 
USB_D-: 
pads on no net: "XBee PRO.4" "XBee PRO.6" "XBee PRO.7" "XBee PRO.8" "XBee PRO.11" "XBee PRO.13" "XBee PRO.14" "XBee PRO.15" "XBee PRO.17" "XBee PRO.18" "XBee PRO.19" "XBee PRO.20" +3.3V.1@10.785,75.609 +3.3V.4 +5V.1@54.486,75.561 +5V.4 ?.1@45.645,44.414 ?.4 D2.1 D2.2 J1.1 J1.6 J1.9 J1.M1 J1.M2 U3.4
copper on no net: | length 1893